# Altium PCB HLK-W806-KIT-V1.2.PcbDoc
Units mm, origin at the board's own origin, x right, y up, seen from the top; angles counter-clockwise.
Board outline 64 x 26 mm, 2 copper layers (Top Layer, Bottom Layer); 46 components, 64 nets, 229 pads, 212 vias.
Unrouted connection lines stored in the file: 24.
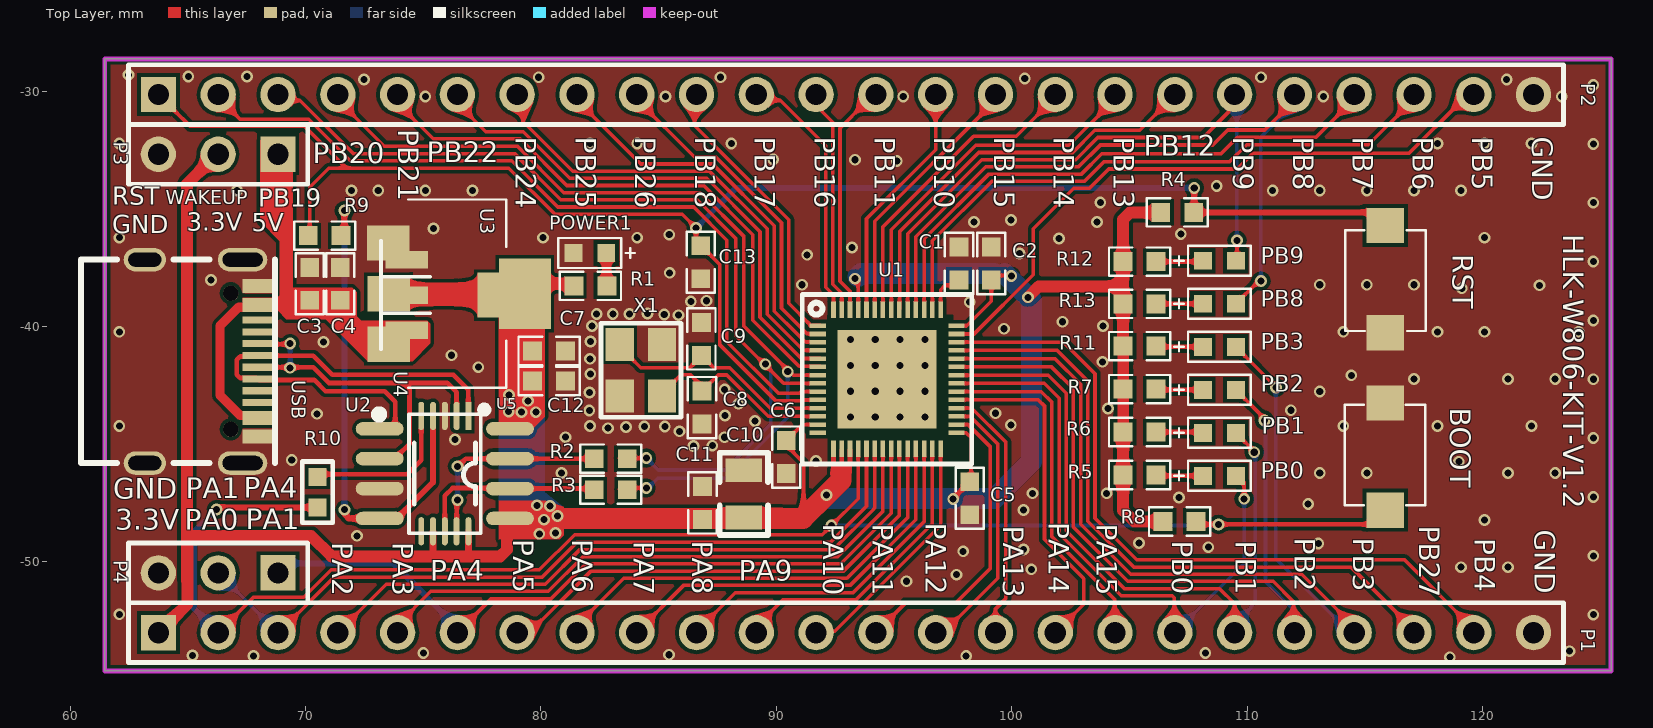
[diagram p0: Top Layer view]
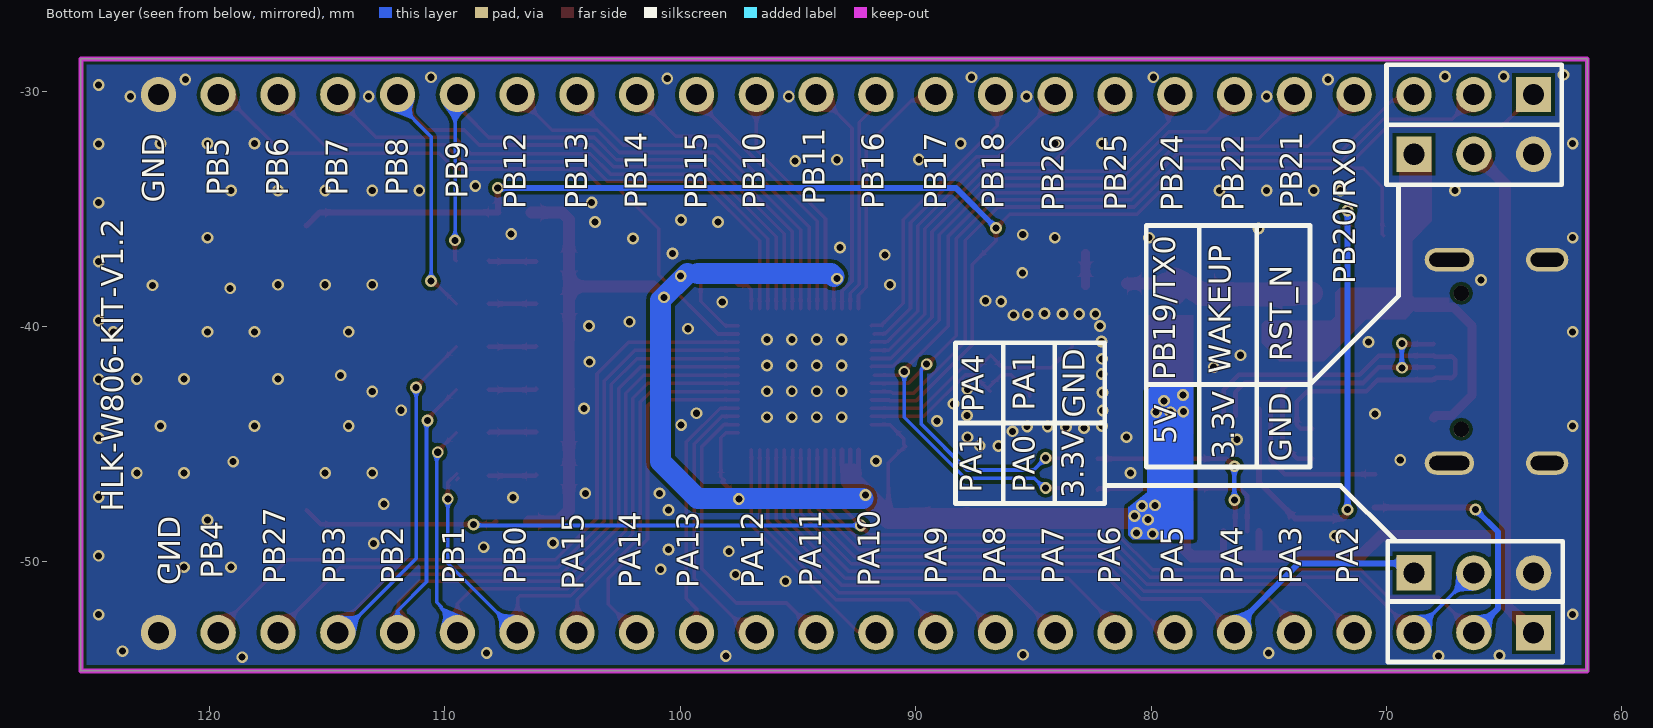
[diagram p1: Bottom Layer view, seen from below]

## Layer stack, top to bottom
Top Solder: solder mask 0.0102, Solder Resist, Dk 3.5
Top Layer: signal copper 0.0356
Dielectric 1: dielectric 0.32, FR-4, Dk 4.8
Bottom Layer: signal copper 0.0356
Bottom Solder: solder mask 0.0102, Solder Resist, Dk 3.5

## Board outline
61.468,-54.635 125.468,-54.635 125.468,-28.635 61.468,-28.635

## Design rules (kind name [scope] priority, off if disabled: settings)
Clearance [All] p1: gap=0.152 ignorepadtopadclearanceinfootprint=FALSE
PlaneConnect PlaneConnect_1 [InNet('5V')] p1: planeconnectstyle=Direct reliefexpansion=0.508 reliefentries=4 reliefconductorwidth=0.254 reliefairgap=0.254
PlaneConnect [All] p2: planeconnectstyle=Direct reliefexpansion=0.508 reliefentries=4 reliefconductorwidth=0.254 reliefairgap=0.254
PolygonConnect PolygonConnect_1 [InNet('5V')] p1: connectstyle=Direct reliefconductorwidth=0.254 reliefentries=4 polygonreliefangle="90 Angle" airgapwidth=0.254
PolygonConnect [All] p2: connectstyle=Direct reliefconductorwidth=0.254 reliefentries=4 polygonreliefangle="90 Angle" airgapwidth=0.254
RoutingVias [All] p1: holewidth=0.3 width=0.5 viastyle="Through Hole" minholewidth=0.3 minwidth=0.5 maxholewidth=0.5 maxwidth=0.7
SolderMaskExpansion [All] p1: expansion=0.102 istentingtop=FALSE
Width PWER [InNetClass('PWER')] p1: maxlimit=1 minlimit=0.5 preferedwidth=0.75
Width XINHAO [InNetClass('XINHAO')] p2: maxlimit=1 minlimit=0.254 preferedwidth=0.5
Width [All] p3: maxlimit=1 minlimit=0.152 preferedwidth=0.254
29 further rules are at their usual default settings.

## Components (designator, comment, footprint, x,y, rotation, side; value= is the part's Value field where it differs from the comment)
BOOT "按键" 正按小龟 115.875,-47.806 r90 top (schematic designator key1)
C1 "4.7uF" 0603 97.765,-37.327 r90 top
C2 "0.1uF" 0603 99.136,-37.327 r270 top
C3 "10UF" 0603_1 70.18,-38.19 r270 top
C4 "0.1UF" 0603_1 71.476,-38.19 r270 top
C5 "0.1uF" 0603 98.221,-47.301 r90 top
C6 "1uF" 0603 90.424,-45.551 r270 top
C7 "0.1UF" 0603_1 80.351,-41.046 r180 top
C8 "15pF" 0603 86.844,-43.449 r90 top
C9 "15pF" 0603 86.82,-40.528 r90 top
C10 "47uF" R0805 88.621,-47.117 r90 top
C11 "0.1uF" 0603 86.868,-47.498 r90 top
C12 "10UF" 0603_1 80.351,-42.316 r180 top value=100pF
C13 "0.1uF" 0603 86.792,-37.273 r270 top
P1 "Header 24" HDR1X24 63.754,-53.011 r0 top
P2 "Header 24" HDR1X24 63.754,-30.151 r0 top
P3 "Header 3" HDR1X3 68.831,-32.685 r180 top
P4 "Header 3" HDR1X3 68.831,-50.47 r180 top
PB0 "" 0603LED 108.128,-46.346 r0 top
PB1 "" 0603LED 108.128,-44.519 r0 top
PB2 "" 0603LED 108.128,-42.692 r0 top
PB3 "" 0603LED 108.128,-40.865 r0 top
PB8 "" 0603LED 108.128,-39.038 r0 top
PB9 "" 0603LED 108.128,-37.211 r0 top
POWER1 "" 0603LED 82.779,-36.881 r180 top
R1 "4.7K" 0603_1 82.107,-38.278 r0 top
R2 "0" 0603_1 82.971,-45.618 r0 top
R3 "0" 0603_1 82.971,-46.939 r0 top
R4 "10K" 0603_1 107.036,-35.154 r180 top
R5 "4.7K" 0603_1 105.435,-46.312 r0 top
R6 "4.7K" 0603_1 105.435,-44.487 r0 top
R7 "4.7K" 0603_1 105.435,-42.662 r0 top
R8 "10K" 0603_1 107.137,-48.285 r0 top
R9 "1K" 0603_1 70.815,-36.144 r0 top
R10 "1K" "R 0603_L" 70.51,-47.041 r90 top
R11 "4.7K" 0603_1 105.435,-40.836 r0 top
R12 "4.7K" 0603_1 105.435,-37.245 r0 top
R13 "4.7K" 0603_1 105.435,-39.041 r0 top
RST "按键" 正按小龟 115.875,-35.712 r270 top (schematic designator key2)
U1 "W806" QFN-56 94.709,-42.245 r0 top
U2 "CH340N" SOP8 75.946,-46.126 r270 top
U3 "AMS1117-3.3" AMS1117 76.149,-38.787 r90 top
U4 "AMS1117-3.3" SOT223 76.53,-38.227 r0 top
U5 "CH340E" MSOP10_L 75.921,-46.253 r180 top
USB "USB_TYPE_C_16Pin" USB-C-16PIN-1 67.266,-37.13 r270 top
X1 "XTAL_40MHz" SMD-3225 84.252,-41.859 r270 top

## Footprints (in the part's own frame and the unit in brackets; to place one, negate y for a bottom-side part, rotate by r counter-clockwise, add the part's x,y. Pads: shape width x height; smd on the part's side, far side on the other; paste and mask are expansions set on the pad)
0603 [mm]
  rect 0.8x0.8 smd: 1(-0.7,0) 2(0.7,0)
  silkscreen extent -1.3,-0.6 1.3,0.6
0603_1 [mm]
  rect 0.8x0.8 smd: 1(-0.7,0) 2(0.7,0)
  silkscreen extent -1.3,-0.6 1.3,0.6
0603LED [mil] "0603贴片LED"
  rect 30x30 smd: 1(0,0) 2(55,0)
  silkscreen extent -48,-25 80,25
AMS1117 [mm]
  rect 1.9x1.8 smd: 0(0.118,-2.059)
  rect 0.75x1.8 smd: 1(1.618,1.841) 2(0.118,1.841) 3(-1.382,1.841)
  silkscreen extent -2.18,0.84 2.42,2.94, body extent -2.13,-2.23 2.37,1.77, height 1.5
HDR1X3 [mm] "Connector; Header; 3 Position"
  rect 1.5x1.5 hole 0.9: 1(0,0)
  round 1.5 hole 0.9: 2(2.54,0) 3(5.08,0)
  silkscreen extent -1.27,-1.27 6.35,1.27
HDR1X24 [mm] "Connector; Header; 24 Position"
  rect 1.5x1.5 hole 0.9: 1(0,0)
  round 1.5 hole 0.9: 2(2.54,0) 3(5.08,0) 4(7.62,0) 5(10.16,0) 6(12.7,0) 7(15.24,0) 8(17.78,0) 9(20.32,0) 10(22.86,0) 11(25.4,0) 12(27.94,0) 13(30.48,0) 14(33.02,0) 15(35.56,0) 16(38.1,0) 17(40.64,0) 18(43.18,0) 19(45.72,0) 20(48.26,0) 21(50.8,0) 22(53.34,0) 23(55.88,0) 24(58.42,0)
  silkscreen extent -1.27,-1.27 59.69,1.27
MSOP10_L [mm] "塑封体长3mm，宽3mm，脚距0.5"
  rect 0.25x1.2 smd: 1(-1,-2.45)
  oval 0.25x1.2 smd: 2(-0.5,-2.45) 3(0,-2.45) 4(0.5,-2.45) 5(1,-2.45) 6(1,2.45) 7(0.5,2.45) 8(0,2.45) 9(-0.5,2.45) 10(-1,2.45)
  silkscreen extent -1.3,-2.67 2.95,1.3, body extent -1.5,-2.45 1.5,2.45, height 0.95
QFN-56 [mm]
  rect 0.7x0.195 smd: 1(-2.95,2.275) 2(-2.95,1.925) 3(-2.95,1.575) 4(-2.95,1.225) 5(-2.95,0.875) 6(-2.95,0.525) 7(-2.95,0.175) 8(-2.95,-0.175) 9(-2.95,-0.525) 10(-2.95,-0.875) 11(-2.95,-1.225) 12(-2.95,-1.575) 13(-2.95,-1.925) 14(-2.95,-2.275) 29(2.95,-2.275) 30(2.95,-1.925) 31(2.95,-1.575) 32(2.95,-1.225) 33(2.95,-0.875) 34(2.95,-0.525) 35(2.95,-0.175) 36(2.95,0.175) 37(2.95,0.525) 38(2.95,0.875) 39(2.95,1.225) 40(2.95,1.575) 41(2.95,1.925) 42(2.95,2.275)
  rect 0.195x0.7 smd: 15(-2.275,-2.95) 16(-1.925,-2.95) 17(-1.575,-2.95) 18(-1.225,-2.95) 19(-0.875,-2.95) 20(-0.525,-2.95) 21(-0.175,-2.95) 22(0.175,-2.95) 23(0.525,-2.95) 24(0.875,-2.95) 25(1.225,-2.95) 26(1.575,-2.95) 27(1.925,-2.95) 28(2.275,-2.95) 43(2.275,2.95) 44(1.925,2.95) 45(1.575,2.95) 46(1.225,2.95) 47(0.875,2.95) 48(0.525,2.95) 49(0.175,2.95) 50(-0.175,2.95) 51(-0.525,2.95) 52(-0.875,2.95) 53(-1.225,2.95) 54(-1.575,2.95) 55(-1.925,2.95) 56(-2.275,2.95)
  rect 4.2x4.2 smd: 57(0,0)
  silkscreen extent -3.6,-3.6 3.6,3.6
R0805 [mm]
  rect 1x1.55 smd: 1(-1,0) 2(1,0)
  silkscreen extent -1.75,-1.02 1.75,1.02
"R 0603_L" [mil] "1/10W贴片电阻"
  rect 30x30 smd: 1(-25.59,0) 2(25.59,0)
  silkscreen extent -51,-26 51,26, body extent -31,-16 32,16, height 16
SMD-3225 [mm]
  rect 1.4x1.2 smd: 1(-1.1,-0.9) 2(1.1,-0.9) 3(1.1,0.9) 4(-1.1,0.9)
  silkscreen extent -2,-1.7 2,1.7
SOP8 [mm]
  oval 0.574x2.036 smd: 1(-1.777,-2.792) 2(-0.507,-2.792) 3(0.763,-2.792) 4(2.033,-2.792) 5(2.033,2.743) 6(0.763,2.743) 7(-0.507,2.743) 8(-1.777,2.743)
  silkscreen extent -2.74,-1.55 2.65,1.8
SOT223 [mm]
  rect 2.2x3 smd: 0(2.794,-0.381)
  rect 1.8x1.5 smd: 1(-3.017,1.772) 2(-2.995,-0.384) 3(-2.995,-2.534)
  silkscreen extent -2.16,-4.38 1.99,3.62
USB-C-16PIN-1 [mm]
  oval 1x2.099 hole 0.6 slot 1.7 at 90 deg: 1(0.034,0.061) 2(8.674,0.061)
  oval 1x1.799 hole 0.6 slot 1.4 at 90 deg: 3(0.034,-4.088) 4(8.674,-4.088)
  rect 0.6x1.35 smd: A1B12(1.154,0.736) A4B9(1.954,0.736) B1A12(7.554,0.736) B4A9(6.754,0.736)
  rect 0.3x1.35 smd: A5(3.104,0.736) A6(4.104,0.736) A7(4.604,0.736) A8(2.604,0.736) B5(6.104,0.736) B6(5.104,0.736) B7(3.604,0.736) B8(5.604,0.736)
  round 0.65 hole 0.65 unplated: ""(1.464,-0.438) ""(7.244,-0.438)
  silkscreen extent 0.04,-6.81 8.67,1.45
正按小龟 [mm]
  rect 1.5x1.6 smd: 1(0,0) 2(4.55,0)
  silkscreen extent 0.2,-1.7 4.48,1.73

## Part data
C1 C2 C5 C6 C8 C9 C10 C11 C13: library part "CAP NP_Dup1"
C3 C4 C7: library part CAP, "Capacitor"
C12: library part Cap, "Capacitor", LatestRevisionDate=17-Jul-2002, LatestRevisionNote="Re-released for DXP Platform.", PackageReference=RAD-0.3, Published=8-Jun-2000, Publisher="Altium Limited"
P1 P2: "Header, 24-Pin", LatestRevisionDate=17-Jul-2002, LatestRevisionNote="Re-released for DXP Platform.", Publisher="Altium Limited"
P3 P4: "Header, 3-Pin", LatestRevisionDate=17-Jul-2002, LatestRevisionNote="Re-released for DXP Platform.", Publisher="Altium Limited"
PB0 PB1 PB2 PB3 PB8 PB9 POWER1: library part LED
R1 R2 R3 R4 R5 R6 R7 R8 R9 R10 R11 R12 R13: library part Res1, "Resistor", LatestRevisionDate=17-Jul-2002, LatestRevisionNote="Re-released for DXP Platform.", PackageReference=AXIAL-0.3, Published=8-Jun-2000, Publisher="Altium Limited"
U1 U3 U4: library part Component_1
U2: BOM_JLCPCB Part Class="Extended Part", BOM_Manufacturer="WCH(Jiangsu Qin Heng)", BOM_Manufacturer Part=CH340N, BOM_Supplier=LCSC, BOM_Supplier Part=C506813, Contributor=LCSC, spicePre=U, spiceSymbolName=CH340N

## Via types
v1: diameter 0.5, hole 0.3, Top Layer to Bottom Layer, tented both sides, 212 vias

## Nets (pads, with @x,y where several pads share a name; then routed paths per layer and width w, separated by ;. In a path a pad name is that pad's centre, name@x,y a point inside that pad or via, vN(x,y) a via of type N, cw(c..) or ccw(c..) an arc to the next point about the centre after c; other vN are vias at no path point)
1: R9.2 U2.4 U5.4 | length 21.6
  Top Layer w0.254: R9.2 71.639,-36.02 71.653,-36.034 v1(71.653,-35.077) ; v1(71.657,-47.787) 71.657,-47.979 71.838,-48.159 U2.4 73.885,-48.159 75.421,-46.623 U5.4 U5.4@75.421,-43.524
  Bottom Layer w0.254: v1(71.657,-47.787) v1@71.657,-35.073
2: R2.1 U2.7 U5.9 | length 8.7
  Top Layer w0.2: U5.9 76.43,-48.694 76.43,-47.395 v1(76.454,-47.371) ; v1(76.463,-45.943) 76.49,-45.943 76.814,-45.619 U2.7 R2.1
  Bottom Layer w0.2: v1(76.454,-47.371) 76.463,-47.362 v1(76.463,-45.943)
3: R3.1 U2.6 U5.8 | length 8
  Top Layer w0.2: U5.8 75.921,-47.194 76.246,-46.869 78.669,-46.869 U2.6 82.22,-46.889 R3.1
5V: C3.2 C4.2 P3.1 U3.3 U4.3 USB.A4B9 USB.B4A9 | length 7
  Top Layer w0.4: USB.B4A9 67.902,-43.784 67.229,-43.784 66.37,-42.925 66.37,-39.975 67.161,-39.184 67.902,-39.184 USB.A4B9
DM1: U2.2 U5.2 USB.A7 USB.B7 | length 16.5
  Top Layer w0.2: USB.A7 70.329,-41.734 70.997,-42.402 74.166,-42.402 ; USB.B7 68.022,-40.753 69.321,-40.753 v1(69.351,-40.723) ; U2.2 73.783,-45.619 74.424,-44.978 74.424,-42.66 74.166,-42.402 ; U5.2 76.421,-42.794 76.029,-42.402 74.166,-42.402
  Bottom Layer w0.2: v1(69.345,-41.759) 69.351,-41.753 v1(69.351,-40.723)
DP1: U2.1 U5.1 USB.A6 USB.B6 | length 21.2
  Top Layer w0.2: USB.B6@67.977,-42.259 67.902,-42.184 67.209,-42.184 67.075,-42.05 67.075,-41.417 67.209,-41.284 67.952,-41.284 USB.A6 68.01,-41.241 70.335,-41.241 71.143,-42.049 76.286,-42.049 76.921,-42.683 U5.1 ; USB.B6 68.042,-42.273 70.371,-42.273 70.851,-42.754 73.368,-42.754 73.812,-43.199 73.812,-44.176 73.64,-44.349 U2.1
GND: BOOT.2 C1.2 C2.1 C3.1 C4.1 C5.1 C6.2 C7.1 C8.1 C9.2 C10.2 C11.2 C12.1 C13.2 P1.24 P2.24 P3.3 P4.3 POWER1.2 RST.2 U1.57 U2.3 U3.1 U4.1 U5.3 USB.1 USB.2 USB.3 USB.4 USB.A1B12 USB.B1A12 X1.2 X1.4
  other v1: 118.618,-54.051 67.793,-54 98.069,-54 65.202,-53.975 85.446,-53.95 75.006,-53.873 108.229,-53.873 123.698,-53.797 124.714,-52.244 62.091,-52.229 95.529,-50.825 97.663,-50.546 100.838,-50.318 119.091,-50.229 121.091,-50.229 124.714,-49.744 97.942,-49.555 100.508,-49.479 108.356,-49.378 113.03,-49.225 105.41,-49.2 72.187,-48.895 120.091,-48.229 100.508,-47.803 112.598,-47.549 107.112,-47.269 124.714,-47.244 100.889,-47.092 104.038,-47.092 80.874,-46.228 113.091,-46.229 115.091,-46.229 121.091,-46.229 123.091,-46.229 118.999,-45.746 91.694,-45.72 69.418,-45.669 86.487,-45.085 87.284,-45.068 76.352,-44.806 124.714,-44.744 81.051,-44.704 87.801,-44.708 85.888,-44.458 82.855,-44.323 83.617,-44.272 84.396,-44.255 85.268,-44.247 62.091,-44.229 82.091,-44.229 114.091,-44.229 118.091,-44.229 122.091,-44.229 99.966,-44.182 89.103,-44.016 93.147,-43.856 94.206,-43.856 95.264,-43.856 96.322,-43.856 87.825,-43.783 70.485,-43.713 99.314,-43.688 82.058,-43.567 111.862,-43.561 104.089,-43.485 88.392,-43.287 82.069,-42.806 113.091,-42.763 93.147,-42.755 94.206,-42.755 95.264,-42.755 96.322,-42.755 87.808,-42.672 117.091,-42.229 121.091,-42.229 123.091,-42.229 124.714,-42.244 114.431,-42.077 82.1,-42.024 77.343,-41.732 93.147,-41.655 94.206,-41.655 95.264,-41.655 96.322,-41.655 103.861,-41.504 82.09,-41.378 76.2,-41.224 70.764,-40.665 82.111,-40.638 93.147,-40.554 94.206,-40.554 95.264,-40.554 96.322,-40.554 62.091,-40.229 114.091,-40.229 118.091,-40.229 120.091,-40.229 124.091,-40.229 99.674,-40.098 82.169,-39.98 103.886,-39.981 102.159,-39.802 124.714,-39.744 85.852,-39.522 85.242,-39.497 82.372,-39.472 83.058,-39.472 83.769,-39.472 84.531,-39.446 98.222,-38.964 86.373,-38.945 87.032,-38.91 119.126,-38.38 122.428,-38.253 91.091,-38.229 113.091,-38.229 115.091,-38.229 117.091,-38.229 65.989,-38.024 85.472,-37.721 124.714,-37.244 91.313,-36.957 100.33,-36.906 93.218,-36.652 102.011,-36.261 62.091,-36.229 80.091,-36.229 84.091,-36.229 120.091,-36.229 85.456,-36.102 107.188,-36.068 75.438,-35.84 98.406,-35.564 103.632,-35.56 99.979,-35.474 103.77,-34.737 124.714,-34.744 67.091,-34.229 71.954,-34.229 73.091,-34.229 75.091,-34.229 77.091,-34.229 111.091,-34.229 113.091,-34.229 115.091,-34.229 117.091,-34.229 119.091,-34.229 108.712,-34.036 95.123,-32.969 89.872,-32.909 93.345,-32.918 62.091,-32.229 82.091,-32.229 84.091,-32.229 88.091,-32.229 118.091,-32.229 120.091,-32.229 122.091,-32.229 124.714,-32.244 75.091,-30.229 85.294,-30.229 95.396,-30.229 113.243,-30.229 123.37,-30.229 124.714,-29.744 124.714,-29.744 72.492,-29.515 121.031,-29.515 100.559,-29.464 79.908,-29.413 87.63,-29.413 110.592,-29.413 65.024,-29.388 67.513,-29.388 62.484,-29.312
NetC1_1: C1.1 U1.43 | length 1.8
  Top Layer w0.152: U1.43@96.984,-39.255 96.984,-38.437 97.168,-38.252 97.539,-38.252 C1.1
NetPB0_1: PB0.1 R5.2 | length 2
  Top Layer w0.2: R5.2 106.17,-46.346 PB0.1
NetPB1_1: PB1.1 R6.2 | length 2
  Top Layer w0.2: R6.2 108.095,-44.487 PB1.1
NetPB2_1: PB2.1 R7.2 | length 2
  Top Layer w0.2: R7.2 106.166,-42.692 PB2.1
NetPB3_1: PB3.1 R11.2 | length 2
  Top Layer w0.2: R11.2 106.164,-40.865 PB3.1
NetPB8_1: PB8.1 R13.2 | length 2
  Top Layer w0.2: R13.2 106.138,-39.038 PB8.1
NetPB9_1: PB9.1 R12.2 | length 2
  Top Layer w0.2: R12.2 108.094,-37.245 PB9.1
NetPOWER1_1: POWER1.1 R1.2 | length 1.4
  Top Layer w0.381: R1.2@82.793,-38.264 POWER1.1@82.793,-36.895
NetR10_2: R10.2 U5.5 | length 6.8
  Top Layer w0.2: R10.2@70.485,-46.277 74.32,-46.277 74.921,-45.676 U5.5 U5.5@74.921,-43.524
PA0/BOOT: BOOT.1 P1.2 R8.2 R10.1 U1.18 | length 66.8
  Top Layer w0.152: P1.2 67.794,-51.511 69.927,-51.511 71.095,-50.343 79.937,-50.343 81.434,-48.846 91.952,-48.846 v1(92.342,-48.456) 93.478,-47.319 93.478,-45.24 U1.18@93.484,-45.235
  Top Layer w0.2: R8.2 107.962,-48.41 v1(108.795,-48.41) 115.271,-48.41 BOOT.1
  Top Layer w0.254: v1(66.218,-47.777) 66.284,-47.777 66.371,-47.691 R10.1
  Bottom Layer w0.152: v1(92.342,-48.456) 108.749,-48.456 v1(108.795,-48.41)
  Bottom Layer w0.254: v1(66.218,-47.777) 65.262,-48.734 65.262,-51.978 P1.2
PA1: P1.3 P4.2 U1.19 | length 33.2
  Top Layer w0.152: P1.3 68.858,-53.011 71.222,-50.648 80.063,-50.648 81.536,-49.174 92.303,-49.174 93.834,-47.643 U1.19@93.834,-45.235
  Bottom Layer w0.152: P4.2 P1.3
PA2: P1.4 U1.20 | length 27.5
  Top Layer w0.152: P1.4 73.432,-50.952 80.189,-50.952 81.662,-49.479 92.429,-49.479 94.138,-47.77 94.138,-47.748 94.184,-47.703 U1.20@94.184,-45.235
PA3: P1.5 U1.21 | length 25.6
  Top Layer w0.152: P1.5 73.914,-52.671 75.328,-51.257 80.316,-51.257 81.789,-49.784 92.606,-49.784 94.534,-47.857 U1.21@94.534,-45.235
PA4: P1.6 P4.1 U1.22 | length 32.2
  Top Layer w0.152: P1.6 77.883,-51.581 80.422,-51.581 81.915,-50.089 92.735,-50.089 94.884,-47.94 U1.22@94.884,-45.235
  Bottom Layer w0.254: P4.1@68.831,-50.063 73.729,-50.063 76.454,-52.788 P1.6
PA5: P1.7 U1.23 | length 21.1
  Top Layer w0.152: P1.7 79.008,-52.997 79.524,-52.997 82.127,-50.394 92.861,-50.394 95.234,-48.021 U1.23@95.234,-45.235
PA6: P1.8 U1.24 | length 19.1
  Top Layer w0.152: P1.8 81.534,-52.692 83.528,-50.698 93.003,-50.698 95.584,-48.118 U1.24@95.584,-45.235
PA7: P1.9 U1.25 | length 16.8
  Top Layer w0.152: P1.9 84.074,-52.987 86.058,-51.003 93.137,-51.003 95.934,-48.207 U1.25@95.934,-45.235
PA8: P1.10 U1.26 | length 14.7
  Top Layer w0.152: P1.10 86.614,-52.959 88.265,-51.308 93.263,-51.308 96.284,-48.288 U1.26@96.284,-45.235
PA9: P1.11 U1.27 | length 12.4
  Top Layer w0.152: P1.11@89.154,-52.604 89.294,-52.604 90.286,-51.613 93.391,-51.613 96.626,-48.378 96.626,-45.243 U1.27@96.634,-45.235
PA10: P1.12 U1.28 | length 10.4
  Top Layer w0.152: P1.12 91.753,-52.951 92.484,-52.951 96.984,-48.451 U1.28@96.984,-45.235
PA11: P1.13 U1.30 | length 13.1
  Top Layer w0.152: P1.13 95.493,-51.752 97.627,-51.752 99.101,-50.278 99.101,-45.121 98.15,-44.17 U1.30@97.534,-44.17
PA12: P1.14 U1.31 | length 11.7
  Top Layer w0.152: P1.14 97.098,-53.011 99.405,-50.704 99.405,-44.994 98.231,-43.82 U1.31@97.534,-43.82
PA13: P1.15 U1.32 | length 11.1
  Top Layer w0.152: U1.32@97.534,-43.47 98.312,-43.47 99.754,-44.912 99.754,-51.562 99.314,-52.002 P1.15
PA14: P1.16 U1.33 | length 14.8
  Top Layer w0.152: U1.33@97.534,-43.12 97.539,-43.115 97.693,-43.115 97.699,-43.11 101.124,-43.11 101.397,-43.382 101.397,-49.047 103.061,-50.711 103.061,-51.804 P1.16
PA15: P1.17 U1.34 | length 15.3
  Top Layer w0.152: U1.34@97.534,-42.77 101.264,-42.77 101.702,-43.208 101.702,-48.756 101.713,-48.767 101.713,-48.932 104.379,-51.598 104.379,-52.996 P1.17
PB0: P1.18 PB0.2 U1.35 | length 26
  Top Layer w0.152: U1.35@97.534,-42.42 101.384,-42.42 102.017,-43.053 102.017,-48.806 104.654,-51.442 106.825,-51.442 106.914,-51.531 106.914,-52.991 P1.18 ; PB0.2@109.449,-46.457 PB0.2@109.499,-46.507 ; PB0.2@109.499,-46.253 109.878,-46.632 v1(109.878,-47.325)
  Bottom Layer w0.152: P1.18@106.934,-52.604 107.329,-52.604 109.878,-50.055 v1(109.878,-47.325)
PB1: P1.19 PB1.2 U1.36 | length 29
  Top Layer w0.152: U1.36@97.539,-42.075 101.555,-42.075 102.322,-42.843 102.322,-48.679 104.78,-51.137 108.824,-51.137 109.474,-51.787 P1.19@109.474,-52.604 ; PB1.2 110.308,-45.303 v1(110.308,-45.345)
  Bottom Layer w0.152: P1.19@109.516,-52.604 110.151,-51.969 110.151,-51.928 110.357,-51.721 110.357,-45.394 v1(110.308,-45.345)
PB2: P1.20 PB2.2 U1.37 | length 34.3
  Top Layer w0.152: U1.37@97.534,-41.72 101.697,-41.72 102.627,-42.65 102.627,-48.525 104.934,-50.832 111.11,-50.832 111.973,-51.695 111.973,-52.563 P1.20@112.014,-52.604 ; PB2.2 110.744,-43.911 v1(110.744,-43.993)
  Bottom Layer w0.152: v1(110.744,-43.993) 110.787,-44.036 110.787,-50.849 112.014,-52.076 P1.20
PB3: P1.21 PB3.2 U1.38 | length 39.7
  Top Layer w0.152: U1.38@97.534,-41.37 101.844,-41.37 102.932,-42.458 102.932,-48.399 105.06,-50.527 112.322,-50.527 114.554,-52.76 P1.21 ; PB3.2 111.227,-42.567 v1(111.227,-42.596)
  Bottom Layer w0.152: v1(111.227,-42.596) 111.227,-49.862 114.024,-52.66 114.498,-52.66 P1.21@114.554,-52.604
PB4: P1.23 U1.40 | length 30.9
  Top Layer w0.152: U1.40@97.534,-40.67 102.202,-40.67 103.541,-42.009 103.541,-48.147 105.313,-49.918 116.692,-49.918 119.634,-52.86 P1.23
PB5: P2.23 U1.41 | length 27.1
  Top Layer w0.152: U1.41@97.534,-40.32 98.404,-40.32 100.919,-37.805 100.919,-35.854 102.637,-34.136 103.307,-34.136 104.132,-33.311 109.386,-33.311 109.388,-33.31 109.591,-33.31 110.266,-32.635 116.898,-32.635 119.068,-30.465 119.212,-30.465 P2.23@119.38,-30.633
PB6_TX1: P2.22 U1.44 | length 26
  Top Layer w0.152: U1.44@96.634,-39.255 96.634,-36.362 99.164,-33.831 103.098,-33.831 103.922,-33.006 109.26,-33.006 109.987,-32.28 115.157,-32.28 117.094,-30.343 P2.22
PB7_RX1: P2.21 U1.45 | length 23.6
  Top Layer w0.152: U1.45@96.284,-39.255 96.284,-36.281 99.038,-33.526 102.971,-33.526 103.833,-32.664 108.895,-32.664 109.599,-31.96 112.931,-31.96 114.258,-30.633 P2.21@114.554,-30.633
PB8: P2.20 PB8.2 U1.46 | length 31.8
  Top Layer w0.152: U1.46@95.934,-39.255 95.934,-36.191 98.903,-33.222 102.845,-33.222 103.774,-32.292 108.54,-32.292 109.177,-31.655 110.76,-31.655 112.014,-30.401 P2.20 ; PB8.2 110.422,-38.141 110.525,-38.141 v1(110.592,-38.075)
  Bottom Layer w0.152: v1(110.592,-38.075) 110.592,-31.936 112.014,-30.514 P2.20
PB9: P2.19 PB9.2 U1.47 | length 26
  Top Layer w0.152: U1.47@95.584,-39.255 95.584,-36.069 98.736,-32.917 102.719,-32.917 103.663,-31.972 108.135,-31.972 109.216,-30.891 109.216,-30.773 109.356,-30.633 P2.19@109.474,-30.633 ; PB9.2 109.576,-37.16 v1(109.576,-36.343)
  Bottom Layer w0.152: P2.19@109.474,-30.633 109.572,-30.731 109.572,-36.339 v1(109.576,-36.343)
PB10: P2.14 U1.52 | length 9.8
  Top Layer w0.152: U1.52@93.834,-39.255 93.835,-39.254 93.835,-35.428 96.774,-32.488 P2.14@96.774,-30.633
PB11: P2.13 U1.54 | length 9.8
  Top Layer w0.152: U1.54@93.134,-39.255 93.134,-38.511 92.71,-38.087 92.71,-31.574 93.743,-30.541 94.141,-30.541 P2.13@94.234,-30.633
PB12: P2.18 U1.48 | length 17.2
  Top Layer w0.152: U1.48@95.239,-39.25 95.239,-35.972 98.599,-32.612 102.593,-32.612 103.537,-31.668 105.445,-31.668 106.508,-30.605 106.905,-30.605 P2.18@106.934,-30.633
PB13: P2.17 U1.49 | length 15
  Top Layer w0.152: U1.49@94.889,-39.25 94.889,-35.895 94.934,-35.849 94.934,-35.846 98.473,-32.307 102.428,-32.307 104.102,-30.633 P2.17@104.394,-30.633
PB14: P2.16 U1.50 | length 13.2
  Top Layer w0.152: U1.50@94.534,-39.255 94.534,-35.771 98.384,-31.92 100.199,-31.92 101.854,-30.265 P2.16
PB15: P2.15 U1.51 | length 10.9
  Top Layer w0.152: U1.51@94.184,-39.255 94.184,-35.53 99.08,-30.633 P2.15@99.314,-30.633
PB16: P2.12 U1.55 | length 9.1
  Top Layer w0.152: P2.12@91.707,-30.633 91.812,-30.633 91.952,-30.773 91.952,-30.879 92.405,-31.332 92.405,-38.214 92.784,-38.592 U1.55@92.784,-39.255
PB17: P2.11 U1.56 | length 10.9
  Top Layer w0.152: P2.11 89.397,-30.394 90.173,-30.394 92.1,-32.322 92.1,-38.34 92.434,-38.673 U1.56@92.434,-39.255
PB18: P2.10 U1.1 | length 12.3
  Top Layer w0.152: P2.10 86.532,-30.233 86.532,-31.473 87.547,-32.489 90.528,-35.47 90.528,-39.021 91.456,-39.949 91.862,-39.949 U1.1@91.884,-39.97
PB19_TX0: P2.3 R2.2 U1.8 | length 40.6
  Top Layer w0.152: P2.3@68.805,-30.409 69.784,-30.409 72.031,-32.656 78.884,-32.656 80.85,-34.623 86.643,-34.623 88.283,-36.263 88.283,-40.391 90.312,-42.42 U1.8@91.884,-42.42 ; R2.2@83.34,-45.593 v1(84.48,-45.593)
  Bottom Layer w0.152: v1(84.48,-45.593) 84.988,-46.101 87.819,-46.101 89.773,-44.148 89.773,-41.835 89.586,-41.648 89.543,-41.605 v1(89.535,-41.605)
PB20_RX0: P2.4 R3.2 U1.7 | length 38
  Top Layer w0.152: P2.4 71.374,-30.374 73.352,-32.351 79.01,-32.351 80.977,-34.318 86.769,-34.318 88.628,-36.177 88.628,-39.993 90.49,-41.855 v1(90.49,-41.922) ; R3.2@83.34,-46.914 83.391,-46.863 v1(84.48,-46.863) ; v1@90.546,-41.884 90.732,-42.07 U1.7
  Bottom Layer w0.152: v1(84.48,-46.863) 84.557,-46.863 84.969,-46.45 ; 84.963,-46.45 84.969,-46.45 ; v1(90.49,-41.922) 90.49,-43.861 87.901,-46.45 84.969,-46.45
PB21: P2.5 U1.6 | length 24.6
  Top Layer w0.152: P2.5@74.032,-30.633 75.428,-32.03 79.119,-32.03 81.103,-34.013 86.916,-34.013 89.004,-36.101 89.004,-39.731 90.969,-41.696 91.396,-41.696 91.398,-41.699 91.862,-41.699 U1.6@91.884,-41.72
PB22: P2.6 U1.5 | length 21.9
  Top Layer w0.152: P2.6@76.572,-30.633 77.663,-31.725 79.246,-31.725 81.229,-33.708 87.042,-33.708 89.309,-35.975 89.309,-39.605 90.639,-40.935 91.067,-41.363 91.876,-41.363 U1.5@91.884,-41.37
PB24: P2.7 U1.4 | length 19.5
  Top Layer w0.152: P2.7@79.112,-30.633 79.252,-30.773 79.252,-31.3 81.355,-33.404 87.169,-33.404 89.614,-35.849 89.614,-39.479 90.765,-40.63 91.148,-41.013 91.876,-41.013 U1.4@91.884,-41.02
PB25: P2.8 U1.3 | length 17
  Top Layer w0.152: P2.8 81.534,-30.392 84.241,-33.099 87.295,-33.099 89.919,-35.722 89.919,-39.352 90.892,-40.325 91.225,-40.659 91.873,-40.659 U1.3@91.884,-40.67
PB26: P2.9 U1.2 | length 14.1
  Top Layer w0.152: P2.9 84.074,-30.358 86.51,-32.794 87.421,-32.794 90.223,-35.596 90.223,-39.224 91.306,-40.307 91.745,-40.307 U1.2
PB27: P1.22 U1.39 | length 28.1
  Top Layer w0.152: U1.39@97.534,-41.02 101.937,-41.02 103.237,-42.319 103.237,-48.273 105.186,-50.223 114.416,-50.223 117.094,-52.9 P1.22
RESET: C13.1 P2.1 R4.1 R9.1 RST.1 U1.10 | length 71.1
  Top Layer w0.152: P2.1 64.428,-30.825 65.092,-31.489 67.079,-31.489 67.094,-31.504 69.975,-31.504 71.745,-33.274 ; R9.1 70.18,-36.079 70.18,-34.087 70.993,-33.274 71.745,-33.274 ; U1.10@91.884,-43.12 91.876,-43.127 91.13,-43.127 91.108,-43.149 89.971,-43.149 87.592,-40.77 87.592,-37.363 86.592,-36.363 v1(86.592,-35.818) 86.007,-35.232 80.598,-35.232 78.64,-33.274 71.745,-33.274
  Top Layer w0.254: v1(107.758,-34.115) 107.758,-35.131 R4.1 115.316,-35.154 RST.1
  Bottom Layer w0.254: v1(86.592,-35.818) 88.295,-34.115 v1(107.758,-34.115)
VCC3_3: C2.2 C5.2 C6.1 C7.2 C10.1 C11.1 C12.2 P1.1 P3.2 R1.1 R4.2 R5.1 R6.1 R7.1 R8.1 R11.1 R12.1 R13.1 U1.13 U1.15 U1.16 U1.17 U1.29 U1.42 U1.53 U2.5 U2.8 U3.0 U3.2 U4.0 U4.2 U5.7 U5.10 | length 124.1
  Top Layer w0.152: 91.161,-48.129 91.161,-45.787 90.474,-45.101 90.424,-45.101 90.518,-45.007 90.518,-44.761 91.109,-44.17 U1.13@91.884,-44.17 ; 92.713,-46.101 92.784,-46.03 ; U1.17@93.128,-45.24 U1.17@93.134,-45.235 ; v1(93.35,-37.972) 93.484,-38.106 U1.53@93.484,-39.255 ; U1.42@97.534,-39.97 98.098,-39.97 99.136,-38.932 C2.2 99.328,-37.835 99.965,-37.835 v1(99.989,-37.859) ; U1.29@97.539,-44.525 98.074,-44.525 98.28,-44.731 98.28,-46.393 C5.2@98.147,-46.526
  Top Layer w0.2: v1(97.519,-47.331) 97.519,-47.303 C5.2
  Top Layer w0.203: U1.15@92.434,-45.235 92.434,-45.822 92.434,-45.967 92.748,-46.281 93.128,-45.901 U1.17@93.128,-45.24 ; 92.784,-46.03 U1.16@92.784,-45.235
  Top Layer w0.3: U5.7 75.421,-49.686 75.455,-49.721 ; 76.921,-49.721 U5.10
  Top Layer w0.5: P1.1 64.989,-51.775 64.989,-48.894 ; 64.971,-50.8 64.971,-33.941 66.227,-32.685 P3.2 ; 65.123,-48.894 70.23,-48.894 71.108,-49.772 78.278,-49.772 78.562,-49.487 78.562,-48.743 78.613,-48.692 ; U4.0@79.757,-38.175 R1.1@81.026,-38.175 ; v1(100.696,-38.762) 101.155,-38.303 104.735,-38.303 ; R5.1@104.735,-46.363 104.735,-47.815 105.206,-48.285 R8.1 ; R5.1 R6.1 104.742,-44.481 R7.1@104.742,-42.668 ; R7.1 R7.1@104.742,-42.668 ; R4.2@106.322,-35.161 105.028,-35.161 104.735,-35.454 104.735,-40.542 104.742,-40.548 R7.1@104.742,-42.668
  Top Layer w0.889: U2.5 87.782,-48.159 ; 87.833,-48.117 87.875,-48.158 91.131,-48.158 ; 91.161,-48.129 v1(92.131,-47.158) 92.748,-46.541 92.748,-46.281
  Top Layer w1: U4.2@73.205,-38.585 73.206,-38.584 U4.2@73.978,-38.584 ; U4.2@73.978,-38.636 U3.0@77.878,-38.636 ; U3.0@77.856,-38.602 78.102,-38.47 78.726,-38.135 U4.0@78.994,-37.992 ; U4.0@78.994,-38.583 U4.0@79.376,-38.201
  Bottom Layer w0.889: v1@92.239,-47.308 99.277,-47.308 100.838,-45.746 100.838,-38.888 99.695,-37.745 ; v1@93.472,-37.872 93.599,-37.745 99.259,-37.745
  other v1: 79.936,-48.811 80.621,-48.779 80.137,-48.209 80.704,-48.049 80.384,-47.633 79.832,-47.6 79.178,-43.643 79.787,-43.643 78.632,-43.62 79.457,-43.161 78.644,-42.918
WAKEUP: P2.2 U1.9 | length 33.5
  Top Layer w0.152: P2.2 66.294,-30.273 67.22,-31.199 70.143,-31.199 71.905,-32.961 78.758,-32.961 80.366,-34.569 80.724,-34.928 86.49,-34.928 87.903,-36.341 87.903,-40.65 90.097,-42.844 90.981,-42.844 91.056,-42.77 U1.9@91.884,-42.77
XIN: C8.2 U1.12 X1.3 | length 8.4
  Top Layer w0.152: X1.3 85.152,-42.859 85.955,-42.056 85.987,-42.056 86.36,-42.056 C8.2@86.875,-42.57 ; C8.2 87.531,-42.062 87.903,-42.062 89.661,-43.82 U1.12@91.884,-43.82
XOUT: C9.1 U1.11 X1.1 | length 10.2
  Top Layer w0.152: X1.1 83.352,-40.859 84.244,-41.751 86.327,-41.751 86.496,-41.581 86.496,-41.552 C9.1 87.35,-41.757 88.029,-41.757 89.742,-43.47 U1.11@91.884,-43.47
pads on no net: U1.14 U5.6 USB. USB.A5 USB.A8 USB.B5 USB.B8

## Polygon pours and split planes (outlines as drawn)
GND on Top Layer "GND_L01_P017" (solid, pour order 17): 61.62,-28.828 125.509,-28.828 125.509,-54.507 61.62,-54.507
GND on Bottom Layer "GND_L02_P015" (solid, pour order 15): 61.595,-28.829 125.484,-28.829 125.484,-54.508 61.595,-54.508

## Keep-outs
Keep-Out Layer:
  the board outline again, w0.2

## Other copper
Top Layer:
  region net 5V: 69.469,-38.405 69.469,-32.283 69.266,-32.08 68.072,-32.08 68.072,-35.535 68.91,-36.373 68.91,-38.811 69.173,-38.811
  region net VCC3_3: 78.221,-47.396 80.213,-47.396 80.975,-47.65 80.975,-48.87 80.797,-49.047 78.221,-49.047
  region net 5V: 67.335,-38.786 68.809,-38.786 69.24,-38.354 71.984,-38.354 72.187,-38.557 72.187,-39.573 72.365,-39.751 75.184,-39.751 75.311,-39.878 75.311,-40.716 74.549,-41.478 72.644,-41.478 70.866,-39.7 69.19,-39.7 68.834,-39.345 68.809,-39.37 67.335,-39.37
  region net VCC3_3: 78.207,-39.522 78.207,-44.577 79.426,-44.577 80.162,-43.84 80.162,-39.522
  pour cut-out: 92.205,-39.485 97.497,-39.485 97.536,-39.523 97.536,-44.795 97.096,-45.235 92.175,-45.235 92.175,-39.515
Bottom Layer:
  region net VCC3_3: 78.209,-42.57 78.209,-49.047 80.797,-49.047 80.975,-48.869 80.975,-47.681 80.162,-47.054 80.162,-42.723 80.01,-42.57

## Silkscreen, mask and mechanical layers (free items; w line width, h text height)
Top Overlay:
  text "PB21" at 73.635,-31.623 h1.5 r270
  text "PB24" at 78.638,-31.947 h1.5 r270
  text "PB25" at 81.178,-31.947 h1.5 r270
  text "PB26" at 83.718,-31.947 h1.5 r270
  text "PB18" at 86.258,-31.947 h1.5 r270
  text "PB17" at 88.798,-31.947 h1.5 r270
  text "PB16" at 91.338,-31.947 h1.5 r270
  text "PB11" at 93.878,-31.947 h1.5 r270
  text "PB10" at 96.418,-31.947 h1.5 r270
  text "PB15" at 98.958,-31.947 h1.5 r270
  text "PB14" at 101.498,-31.947 h1.5 r270
  text "PB13" at 104.038,-31.947 h1.5 r270
  text "PB9" at 109.118,-31.947 h1.5 r270
  text "PB8" at 111.658,-31.947 h1.5 r270
  text "PB7" at 114.198,-31.947 h1.5 r270
  text "PB6" at 116.738,-31.947 h1.5 r270
  text "PB5" at 119.278,-31.947 h1.5 r270
  text "GND" at 121.818,-31.947 h1.5 r270
  text "PB12" at 105.613,-33.045 h1.5
  text "PB22" at 75.159,-33.325 h1.5
  text "PB20" at 70.307,-33.376 h1.5
  text "WAKEUP" at 64.059,-35.001 h1
  text "RST" at 61.798,-35.077 h1.3
  text "PB19" at 67.996,-35.179 h1.3
  text "HLK-W806-KIT-V1.2" at 123.139,-36.093 h1.5 r270
  text "3.3V" at 64.948,-36.195 h1.3
  text "5V" at 67.716,-36.22 h1.3
  text "GND" at 61.798,-36.297 h1.3
  text "PA4" at 67.386,-47.574 h1.5
  text "PA1" at 64.922,-47.6 h1.5
  text "GND" at 61.824,-47.625 h1.5
  text "PA14" at 101.27,-48.311 h1.5 r270
  text "PA12" at 96.063,-48.336 h1.5 r270
  text "PA10" at 91.694,-48.387 h1.5 r270
  text "PA11" at 93.802,-48.387 h1.5 r270
  text "PA15" at 103.327,-48.387 h1.5 r270
  text "PA13" at 99.339,-48.463 h1.5 r270
  text "PB27" at 117.018,-48.463 h1.5 r270
  text "GND" at 121.92,-48.641 h1.5 r270
  text "PA1" at 67.462,-48.92 h1.5
  text "3.3V" at 61.925,-48.946 h1.5
  text "PA0" at 64.872,-48.946 h1.5
  text "PB2" at 111.735,-48.971 h1.5 r270
  text "PB3" at 114.224,-48.971 h1.5 r270
  text "PB4" at 119.38,-48.997 h1.5 r270
  text "PA5" at 78.537,-49.047 h1.5 r270
  text "PA6" at 81.026,-49.047 h1.5 r270
  text "PA8" at 86.131,-49.098 h1.5 r270
  text "PB0" at 106.528,-49.098 h1.5 r270
  text "PB1" at 109.22,-49.098 h1.5 r270
  text "PA7" at 83.642,-49.124 h1.5 r270
  text "PA2" at 70.841,-49.174 h1.5 r270
  text "PA3" at 73.406,-49.174 h1.5 r270
  text "PA4" at 75.311,-51.105 h1.5
  text "PA9" at 88.417,-51.105 h1.5
Bottom Overlay:
  lines w0.2: 62.509,-51.689 69.952,-51.689 ; 62.56,-31.432 70.002,-31.432 ; 69.494,-34.036 69.494,-38.71 73.254,-42.469 80.213,-42.469 ; 69.634,-49.086 71.958,-46.761 81.915,-46.761 ; 75.514,-45.872 75.514,-35.789 ; 77.953,-45.872 77.953,-35.712 ; 80.137,-35.712 73.254,-35.712 73.254,-45.974 80.213,-45.974 80.213,-35.712 ; 81.966,-44.107 88.316,-44.107 ; 84.099,-47.447 84.099,-40.716 ; 86.284,-47.523 86.284,-40.716 ; 62.509,-54.254 69.952,-54.254 69.952,-49.124 62.509,-49.124 62.509,-54.254 ; 62.56,-33.985 62.56,-28.88 70.002,-28.88 70.002,-33.985 62.56,-33.985 ; 81.966,-47.523 88.316,-47.523 88.316,-40.691 81.966,-40.691 81.966,-47.523
  text "PB8" at 111.274,-34.451 h1.6 r270
  text "PB7" at 113.809,-34.451 h1.6 r270
  text "PB6" at 116.343,-34.451 h1.6 r270
  text "PB5" at 118.878,-34.451 h1.6 r270
  text "PB9" at 108.712,-34.57 h1.6 r270
  text "GND" at 121.615,-34.747 h1.6 r270
  text "PB11" at 93.548,-34.823 h1.6 r270
  text "PB21" at 73.254,-35.001 h1.6 r270
  text "PB14" at 101.117,-35.001 h1.6 r270
  text "PB18" at 85.954,-35.027 h1.6 r270
  text "PB17" at 88.392,-35.027 h1.6 r270
  text "PB16" at 91.034,-35.027 h1.6 r270
  text "PB10" at 96.088,-35.027 h1.6 r270
  text "PB15" at 98.552,-35.027 h1.6 r270
  text "PB13" at 103.632,-35.027 h1.6 r270
  text "PB12" at 106.248,-35.027 h1.6 r270
  text "PB25" at 80.747,-35.077 h1.6 r270
  text "PB22" at 75.743,-35.103 h1.6 r270
  text "PB24" at 78.334,-35.103 h1.6 r270
  text "PB26" at 83.388,-35.103 h1.6 r270
  text "PB20/RX0" at 71.018,-38.202 h1.6 r270
  text "RST_N" at 73.711,-41.478 h1.6 r270
  text "WAKEUP" at 76.302,-42.012 h1.6 r270
  text "PB19/TX0" at 78.664,-42.291 h1.6 r270
  text "PA1" at 84.623,-43.58 h1.6 r270
  text "PA4" at 86.794,-43.653 h1.6 r270
  text "GND" at 82.501,-43.873 h1.6 r270
  text "5V" at 78.613,-45.009 h1.6 r270
  text "3.3V" at 76.149,-45.644 h1.6 r270
  text "GND" at 73.736,-45.745 h1.6 r270
  text "PA0" at 84.623,-47.068 h1.6 r270
  text "PA1" at 86.868,-47.066 h1.6 r270
  text "3.3V" at 82.55,-47.295 h1.6 r270
  text "HLK-W806-KIT-V1.2" at 123.342,-47.879 h1.6 r270
  text "PB4" at 119.126,-50.724 h1.6 r270
  text "PA2" at 70.891,-50.952 h1.6 r270
  text "PA3" at 73.304,-50.952 h1.6 r270
  text "PA4" at 75.794,-50.952 h1.6 r270
  text "PA5" at 78.349,-50.952 h1.6 r270
  text "PA6" at 81.001,-50.952 h1.6 r270
  text "PA7" at 83.388,-50.952 h1.6 r270
  text "PA8" at 85.877,-50.952 h1.6 r270
  text "PA9" at 88.374,-50.952 h1.6 r270
  text "PB0" at 106.248,-50.952 h1.6 r270
  text "PB1" at 108.864,-50.952 h1.6 r270
  text "PB2" at 111.455,-50.952 h1.6 r270
  text "PB3" at 113.944,-50.952 h1.6 r270
  text "PB27" at 116.459,-50.952 h1.6 r270
  text "GND" at 122.504,-51.003 h1.6 r90
  text "PA10" at 91.211,-51.054 h1.6 r270
  text "PA11" at 93.701,-51.054 h1.6 r270
  text "PA12" at 96.164,-51.13 h1.6 r270
  text "PA13" at 98.908,-51.13 h1.6 r270
  text "PA14" at 101.371,-51.13 h1.6 r270
  text "PA15" at 103.784,-51.181 h1.6 r270

## Dimensions
61.468,-28.635 to 61.468,-54.635 on Top Overlay
61.468,-28.635 to 125.468,-28.635 on Top Overlay